# Altium PCB bootleg-4.PcbDoc (part 1 of 2)
Units mm, origin at the board's own origin, x right, y up, seen from the top; angles counter-clockwise.
Board outline 284.8 x 94.3 mm, 2 copper layers (Component Side, Bottom Layer), stack 1.571 mm thick; 140 components, 94 nets, 601 pads, 29 vias.
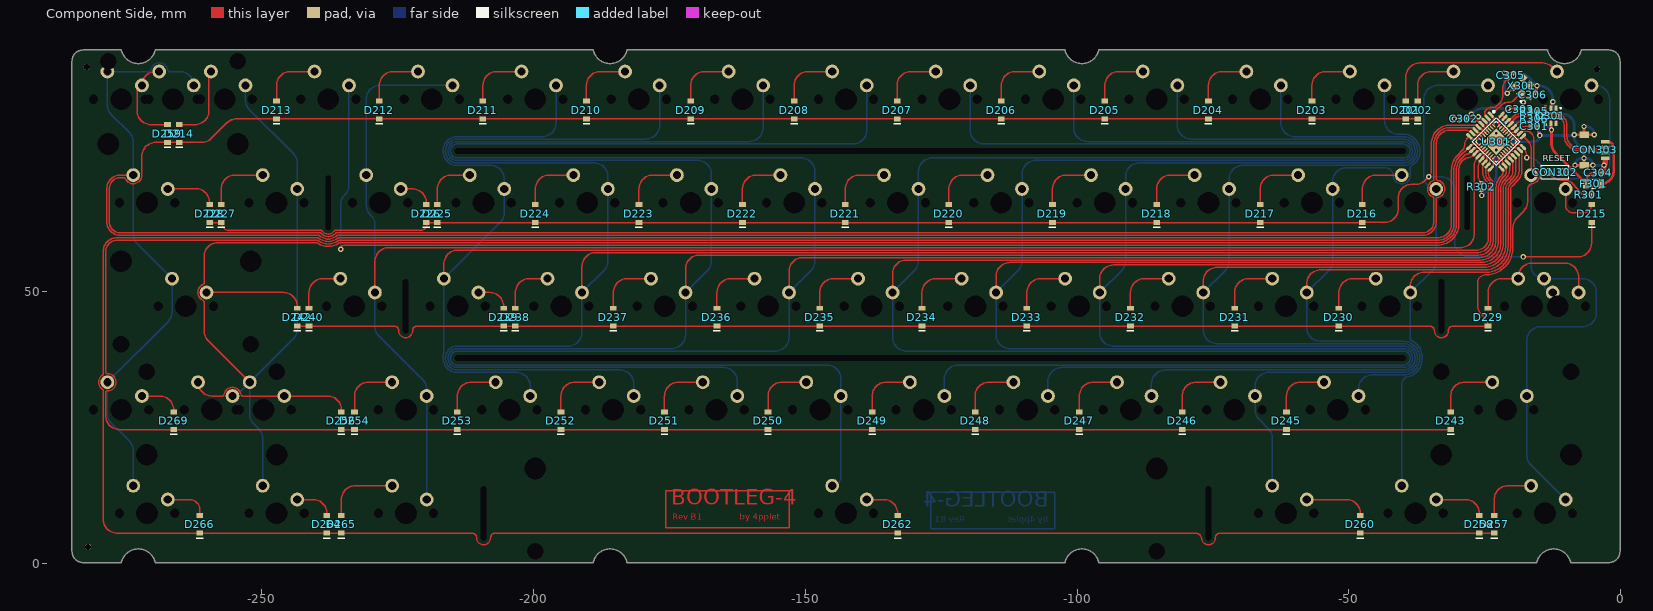
[diagram p0: Component Side view]
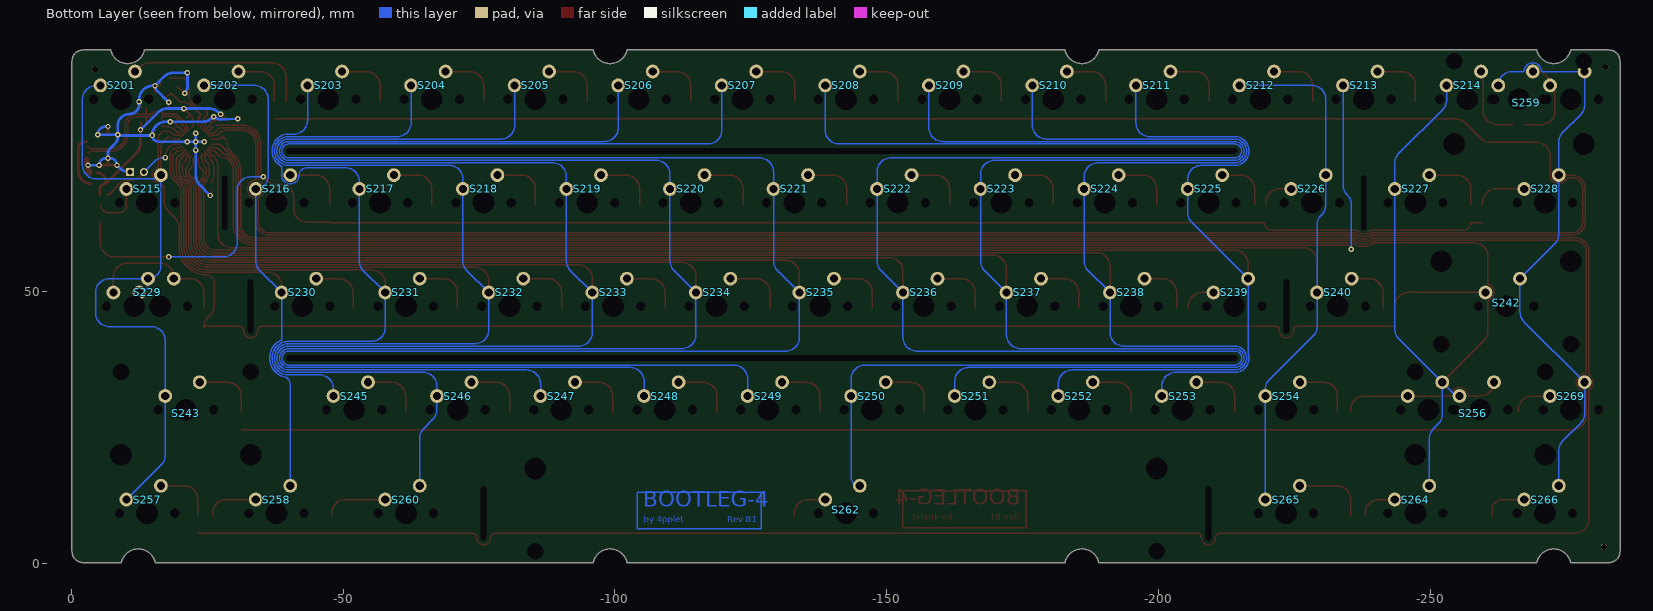
[diagram p1: Bottom Layer view, seen from below]

## Layer stack, top to bottom
Top Solder: solder mask 0.0102, Solder Resist, Dk 3.5
Component Side: signal copper 0.0356
Dielectric 1: core 1.5, FR-4, Dk 4.2
Bottom Layer: signal copper 0.0356
Solder Side: solder mask 0.0102, Solder Resist, Dk 3.5

## Board outline
-282.85,0.165 ccw(c-282.85,0.215) -282.85,0.165 cw(c-282.85,2.215) -284.9,2.215 -284.9,36.565 -284.9,92.414 cw(c-284.85,92.415) -284.9,92.415 cw(c-282.85,92.415) -282.85,94.465 cw(c-282.85,94.415) -282.85,94.465 -275.85,94.465 cw(c-275.85,94.415) -275.801,94.426 ccw(c-272.7,95.149) -269.599,94.426 cw(c-269.55,94.415) -269.55,94.465 -189.05,94.465 cw(c-189.05,94.415) -189.001,94.426 ccw(c-185.9,95.149) -182.799,94.426 cw(c-182.75,94.415) -182.75,94.465 -102.25,94.465 cw(c-102.25,94.415) -102.201,94.426 ccw(c-99.1,95.149) -95.999,94.426 cw(c-95.95,94.415) -95.95,94.465 cw(c-95.95,94.415) -95.95,94.465 -13.477,94.465 cw(c-13.477,94.415) -13.428,94.426 ccw(c-10.327,95.149) -7.226,94.426 cw(c-7.177,94.415) -7.164,94.464 cw(c-7.15,94.415) -7.15,94.465 -2.15,94.465 cw(c-2.15,92.415) -0.1,92.415 -0.1,2.288 -0.1,2.286 ccw(c-0.15,2.286) -0.1,2.288 -0.1,2.286 cw(c-0.15,2.286) -0.1,2.285 -0.1,2.215 cw(c-2.15,2.215) -2.15,0.165 -9.15,0.165 ccw(c-9.15,0.215) -9.15,0.165 cw(c-9.15,0.215) -9.199,0.204 ccw(c-12.3,-0.52) -15.401,0.204 cw(c-15.45,0.215) -15.45,0.165 -95.95,0.165 cw(c-95.95,0.215) -95.999,0.204 ccw(c-99.1,-0.52) -102.201,0.204 ccw(c-99.1,-0.52) -102.201,0.204 cw(c-102.25,0.215) -102.25,0.165 -182.75,0.165 cw(c-182.75,0.215) -182.799,0.204 cw(c-185.9,-0.52) -182.799,0.204 ccw(c-185.9,-0.52) -189.001,0.204 cw(c-189.05,0.215) -189.05,0.165 -269.55,0.165 cw(c-269.55,0.215) -269.55,0.165 cw(c-269.55,0.215) -269.599,0.204 ccw(c-272.7,-0.52) -275.801,0.204 ccw(c-272.7,-0.52) -275.801,0.204 cw(c-275.85,0.215) -275.85,0.165

## Design rules (kind name [scope] priority, off if disabled: settings)
Clearance [All] p1: gap=0.2 ignorepadtopadclearanceinfootprint=FALSE except(0: Arc-Hole Track-Hole SMDPad-Hole THPad-Hole Via-Hole Fill-Hole Poly-Hole Region-Hole Text-Hole; 0.254: THPad-THPad THPad-Via THPad-Fill THPad-Poly THPad-Region THPad-Text Via-Via Via-Fill Via-Poly Via-Region Via-Text Fill-Fill Fill-Poly Fill-Region Fill-Text Poly-Poly Poly-Region Poly-Text Region-Region Region-Text Text-Text)
ComponentClearance [InComponent('No Component') And OnLayer('Component Side')] p1: gap=0.254 collisioncheckmode=3 verticalgap=0.254 showdistances=FALSE
DiffPairsRouting DiffPairsRouting_USB [InDifferentialPairClass('All Differential Pairs')] p1: maxlimit=0.254 minlimit=0.203 mostfreqgap=0.203 toplayer_minwidth=0.152 toplayer_maxwidth=0.381 toplayer_prefwidth=0.152 bottomlayer_minwidth=0.152 bottomlayer_maxwidth=0.381 bottomlayer_prefwidth=0.152 maxuncoupledlength=12.7
DiffPairsRouting [All] p2: maxlimit=0.254 minlimit=0.254 mostfreqgap=0.254 toplayer_minwidth=0.381 toplayer_maxwidth=0.381 toplayer_prefwidth=0.381 bottomlayer_minwidth=0.381 bottomlayer_maxwidth=0.381 bottomlayer_prefwidth=0.381 maxuncoupledlength=12.7
HoleSize [All] p1: absolutevalues=TRUE maxlimit=20 minlimit=0.025 maxpercent=80.000 minpercent=20.000
MatchedLengths MatchedLengths_USB_DiffPairs_1 [All] p1: tolerance=0.127 checknetsindiffpair=TRUE checkdiffpairvsdiffpair=FALSE checkxsignals=FALSE checkothers=FALSE
MatchedLengths MatchedLengths_USB_DiffPairs [All] p2: tolerance=0.127 checknetsindiffpair=TRUE checkdiffpairvsdiffpair=FALSE checkxsignals=FALSE checkothers=FALSE
PolygonConnect PolygonConnect_1 [All vs IsVia] p1: connectstyle=Direct reliefconductorwidth=0.254 reliefentries=4 polygonreliefangle="90 Angle" airgapwidth=0.254
PolygonConnect [All] p2: connectstyle=Relief reliefconductorwidth=0.254 reliefentries=4 polygonreliefangle="90 Angle" airgapwidth=0.254
RoutingVias [All] p1: holewidth=0.711 width=1.27 viastyle="Through Hole" minholewidth=0.711 minwidth=1.27 maxholewidth=0.711 maxwidth=1.27
SolderMaskExpansion [All] p1: expansion=0.102 istentingtop=FALSE
Width [All] p1: maxlimit=1 minlimit=0.203 preferedwidth=0.254 minimp=50.000000 maximp=50.000000 favimp=50.000000
27 further rules are at their usual default settings.

## Classes and differential pairs
component class Designator: C201 C202 C203 C204 C205 C206 D201 D202 D203 D204 D205 D206 D207 D208 D209 D210 D211 D212 D213 D214 D215 D216 D217 D218 D219 D220 D221 D222 D223 D224 D225 D226 D227 D228 D229 D230 D231 D232 D233 D234 D235 D236 D237 D238 D239 D240 D242 D243 D245 D246 D247 D248 D249 D250 D251 D252 D253 D254 D256 D257 D258 D259 D260 D262 D264 D265 D266 D269 S201 S202 S203 S204 S205 S206 S207 S208 S209 S210 S211 S212 S213 S214 S215 S216 S217 S218 S219 S220 S221 S222 S223 S224 S225 S226 S227 S228 S229 S230 S231 S232 S233 S234 S235 S236 S237 S238 S239 S240 S242 S243 S245 S246 S247 S248 S249 S250 S251 S252 S253 S254 S256 S257 S258 S259 S260 S262 S264 S265 S266 S269
differential pair D: +D_P -D_N
differential pair D_PRE: +D_PRE_P -D_PRE_N

## Components (designator, comment, footprint, x,y, rotation, side; value= is the part's Value field where it differs from the comment)
C301 "" C0603[1608] -15.875,80.391 r180 top value=1uF
C302 "" C0603[1608] -28.829,81.788 r0 top value=0.1uF
C303 "" C0603[1608] -18.542,83.566 r180 top value=0.1uF
C304 "" C0603[1608] -4.064,71.882 r180 top value=4,7uF
C305 "" C0603[1608] -20.193,89.789 r225 top value=15pF
C306 "" C0603[1608] -16.129,86.233 r225 top value=15pF
CON302 "Header 2" HDR1X2 -10.795,72.009 r180 top
CON303 "Header 5" "JST SM04B-SRSS-TB" -6.669,78.865 r270 top locked
D201 "Diode" SOD-123 -39.497,83.415 r90 top
D202 "Diode" SOD-123 -37.338,83.415 r90 top
D203 "Diode" SOD-123 -56.769,83.415 r90 top
D204 "Diode" SOD-123 -75.819,83.415 r90 top
D205 "Diode" SOD-123 -94.869,83.415 r90 top
D206 "Diode" SOD-123 -113.919,83.415 r90 top
D207 "Diode" SOD-123 -133.096,83.415 r90 top
D208 "Diode" SOD-123 -152.019,83.415 r90 top
D209 "Diode" SOD-123 -171.069,83.415 r90 top
D210 "Diode" SOD-123 -190.246,83.415 r90 top
D211 "Diode" SOD-123 -209.296,83.415 r90 top
D212 "Diode" SOD-123 -228.346,83.415 r90 top
D213 "Diode" SOD-123 -247.269,83.415 r90 top
D214 "Diode" SOD-123 -265.176,79.097 r90 top
D215 "Diode" SOD-123 -5.334,64.365 r90 top
D216 "Diode" SOD-123 -47.498,64.365 r90 top
D217 "Diode" SOD-123 -66.294,64.365 r90 top
D218 "Diode" SOD-123 -85.344,64.365 r90 top
D219 "Diode" SOD-123 -104.521,64.365 r90 top
D220 "Diode" SOD-123 -123.571,64.365 r90 top
D221 "Diode" SOD-123 -142.621,64.365 r90 top
D222 "Diode" SOD-123 -161.544,64.365 r90 top
D223 "Diode" SOD-123 -180.594,64.365 r90 top
D224 "Diode" SOD-123 -199.644,64.365 r90 top
D225 "Diode" SOD-123 -217.678,64.365 r90 top
D226 "Diode" SOD-123 -219.71,64.365 r90 top
D227 "Diode" SOD-123 -257.429,64.365 r90 top
D228 "Diode" SOD-123 -259.588,64.365 r90 top
D229 "Diode" SOD-123 -24.384,45.315 r90 top
D230 "Diode" SOD-123 -51.816,45.315 r90 top
D231 "Diode" SOD-123 -70.993,45.315 r90 top
D232 "Diode" SOD-123 -90.17,45.315 r90 top
D233 "Diode" SOD-123 -109.22,45.315 r90 top
D234 "Diode" SOD-123 -128.524,45.315 r90 top
D235 "Diode" SOD-123 -147.32,45.315 r90 top
D236 "Diode" SOD-123 -166.243,45.315 r90 top
D237 "Diode" SOD-123 -185.293,45.315 r90 top
D238 "Diode" SOD-123 -203.327,45.315 r90 top
D239 "Diode" SOD-123 -205.486,45.315 r90 top
D240 "Diode" SOD-123 -241.3,45.315 r90 top
D242 "Diode" SOD-123 -243.459,45.315 r90 top
D243 "Diode" SOD-123 -31.242,26.265 r90 top
D245 "Diode" SOD-123 -61.468,26.265 r90 top
D246 "Diode" SOD-123 -80.645,26.265 r90 top
D247 "Diode" SOD-123 -99.568,26.265 r90 top
D248 "Diode" SOD-123 -118.745,26.265 r90 top
D249 "Diode" SOD-123 -137.668,26.265 r90 top
D250 "Diode" SOD-123 -156.845,26.265 r90 top
D251 "Diode" SOD-123 -175.895,26.265 r90 top
D252 "Diode" SOD-123 -194.945,26.265 r90 top
D253 "Diode" SOD-123 -213.995,26.265 r90 top
D254 "Diode" SOD-123 -232.918,26.265 r90 top
D256 "Diode" SOD-123 -235.331,26.265 r90 top
D257 "Diode" SOD-123 -23.241,7.215 r90 top
D258 "Diode" SOD-123 -26,7.215 r90 top
D259 "Diode" SOD-123 -267.335,79.097 r90 top
D260 "Diode" SOD-123 -47.879,7.215 r90 top
D262 "Diode" SOD-123 -133,7.215 r90 top
D264 "Diode" SOD-123 -238,7.215 r90 top
D265 "Diode" SOD-123 -235.331,7.215 r90 top
D266 "Diode" SOD-123 -261.366,7.215 r90 top
D269 "Diode" SOD-123 -266.192,26.265 r90 top
D301 "SRV05" SOT-23-6 -12.827,82.38 r270 top
F301 "Fuse Thermal" C1206[3216] -4.953,69.85 r0 top
R301 "Res1" R0603[1608] -5.842,67.818 r180 top value=10K
R302 "Res1" R0603[1608] -25.654,69.342 r270 top value=10K
R305 "Res1" R0603[1608] -15.875,83.185 r0 top value=22
R306 "Res1" R0603[1608] -15.875,81.788 r0 top value=22
S201 "MX" "MX-switch - switched pol" -9.15,85.415 r180 bottom locked
S202 "MX" "MX-switch - switched pol" -28.2,85.415 r180 bottom locked
S203 "MX" "MX-SWITCH - SWITCHED POL" -47.25,85.415 r180 bottom locked
S204 "MX" "MX-switch - switched pol" -66.3,85.415 r180 bottom locked
S205 "MX" "MX-switch - switched pol" -85.35,85.415 r180 bottom locked
S206 "MX" "MX-switch - switched pol" -104.4,85.415 r180 bottom locked
S207 "MX" "MX-switch - switched pol" -123.45,85.415 r180 bottom locked
S208 "MX" "MX-switch - switched pol" -142.5,85.415 r180 bottom locked
S209 "MX" "MX-switch - switched pol" -161.55,85.415 r180 bottom locked
S210 "MX" "MX-switch - switched pol" -180.6,85.415 r180 bottom locked
S211 "MX" "MX-switch - switched pol" -199.65,85.415 r180 bottom locked
S212 "MX" "MX-switch - switched pol" -218.7,85.415 r180 bottom locked
S213 "MX" "MX-switch - switched pol" -237.75,85.415 r180 bottom locked
S214 "MX" "MX-switch - switched pol" -256.8,85.415 r180 bottom locked
S215 "MX" "MX-switch - 1.5U" -13.912,66.365 r180 bottom locked
S216 "MX" "MX-SWITCH - SWITCHED POL" -37.725,66.365 r180 bottom locked
S217 "MX" "MX-SWITCH - SWITCHED POL" -56.775,66.365 r180 bottom locked
S218 "MX" "MX-SWITCH - SWITCHED POL" -75.825,66.365 r180 bottom locked
S219 "MX" "MX-SWITCH - SWITCHED POL" -94.875,66.365 r180 bottom locked
S220 "MX" "MX-SWITCH - SWITCHED POL" -113.925,66.365 r180 bottom locked
S221 "MX" "MX-SWITCH - SWITCHED POL" -132.975,66.365 r180 bottom locked
S222 "MX" "MX-SWITCH - SWITCHED POL" -152.025,66.365 r180 bottom locked
S223 "MX" "MX-SWITCH - SWITCHED POL" -171.075,66.365 r180 bottom locked
S224 "MX" "MX-SWITCH - SWITCHED POL" -190.125,66.365 r180 bottom locked
S225 "MX" "MX-SWITCH - SWITCHED POL" -209.175,66.365 r180 bottom locked
S226 "MX" MX-switch -228.225,66.365 r180 bottom locked
S227 "MX" "MX-SWITCH - SWITCHED POL" -247.275,66.365 r180 bottom locked
S228 "MX" "MX-switch - 1.5U" -271.087,66.365 r180 bottom locked
S229 "MX" "MX-switch - CAPS" -16.294,47.315 r180 bottom
S230 "MX" "MX-SWITCH - SWITCHED POL" -42.487,47.315 r180 bottom locked
S231 "MX" "MX-SWITCH - SWITCHED POL" -61.537,47.315 r180 bottom locked
S232 "MX" "MX-SWITCH - SWITCHED POL" -80.587,47.315 r180 bottom locked
S233 "MX" "MX-SWITCH - SWITCHED POL" -99.637,47.315 r180 bottom locked
S234 "MX" "MX-SWITCH - SWITCHED POL" -118.687,47.315 r180 bottom locked
S235 "MX" "MX-SWITCH - SWITCHED POL" -137.737,47.315 r180 bottom locked
S236 "MX" "MX-SWITCH - SWITCHED POL" -156.787,47.315 r180 bottom locked
S237 "MX" "MX-SWITCH - SWITCHED POL" -175.837,47.315 r180 bottom locked
S238 "MX" "MX-SWITCH - SWITCHED POL" -194.887,47.315 r180 bottom locked
S239 "MX" MX-switch -213.937,47.315 r180 bottom locked
S240 "MX" "MX-SWITCH - SWITCHED POL" -232.987,47.315 r180 bottom locked
S242 "MX" "MX-switch - Enter_ANSI" -263.95,47.315 r180 bottom locked
S243 "MX" "MX-switch - 2.25U" -21.056,28.265 r180 bottom locked
S245 "MX" "MX-SWITCH - SWITCHED POL" -52.012,28.265 r180 bottom locked
S246 "MX" "MX-SWITCH - SWITCHED POL" -71.062,28.265 r180 bottom locked
S247 "MX" "MX-SWITCH - SWITCHED POL" -90.112,28.265 r180 bottom locked
S248 "MX" "MX-SWITCH - SWITCHED POL" -109.162,28.265 r180 bottom locked
S249 "MX" "MX-SWITCH - SWITCHED POL" -128.212,28.265 r180 bottom locked
S250 "MX" "MX-SWITCH - SWITCHED POL" -147.262,28.265 r180 bottom locked
S251 "MX" "MX-SWITCH - SWITCHED POL" -166.312,28.265 r180 bottom locked
S252 "MX" "MX-SWITCH - SWITCHED POL" -185.362,28.265 r180 bottom locked
S253 "MX" "MX-SWITCH - SWITCHED POL" -204.412,28.265 r180 bottom locked
S254 "MX" "MX-SWITCH - SWITCHED POL" -223.462,28.265 r180 bottom locked
S256 "MX" "MX-switch - right shift" -259.18,28.265 r180 bottom locked
S257 "MX" "MX-switch - 1.5U - switched pol" -13.912,9.215 r180 bottom locked
S258 "MX" MX-switch -37.719,9.215 r180 bottom locked
S259 "MX" "MX-switch - backspace" -266.319,85.415 r180 bottom locked
S260 "MX" "MX-switch - 1.5U" -61.537,9.215 r180 bottom locked
S262 "MX" "MX-SWITCH - 7U SPACE" -142.5,9.215 r0 bottom locked
S264 "MX" MX-switch -247.269,9.215 r180 bottom locked
S265 "MX" "MX-switch - 1.5U - switched pol" -223.45,9.215 r180 bottom locked
S266 "MX" "MX-switch - 1.5U" -271.087,9.215 r180 bottom locked
S269 "MX" MX-SWITCH -275.85,28.265 r180 bottom locked
U301 "ATMEGA32U2" ATMEGA32U2-COMBO -22.886,77.6 r315 top
X301 "XTAL" XTAL-3225 -18.161,87.884 r45 top

## Footprints (in the part's own frame and the unit in brackets; to place one, negate y for a bottom-side part, rotate by r counter-clockwise, add the part's x,y. Pads: shape width x height; smd on the part's side, far side on the other; paste and mask are expansions set on the pad)
ATMEGA32U2-COMBO [mm]
  oval 1.4x0.55 smd: 1(-4.2,2.8) 2(-4.2,2) 3(-4.2,1.2) 4(-4.2,0.4) 5(-4.2,-0.4) 6(-4.2,-1.2) 7(-4.2,-2) 8(-4.2,-2.8) 17(4.2,-2.8) 18(4.2,-2) 19(4.2,-1.2) 20(4.2,-0.4) 21(4.2,0.4) 22(4.2,1.2) 23(4.2,2) 24(4.2,2.8)
  oval 0.85x0.25 smd: 1(-2.4,1.75) 2(-2.4,1.25) 3(-2.4,0.75) 4(-2.4,0.25) 5(-2.4,-0.25) 6(-2.4,-0.75) 7(-2.4,-1.25) 8(-2.4,-1.75) 17(2.4,-1.75) 18(2.4,-1.25) 19(2.4,-0.75) 20(2.4,-0.25) 21(2.4,0.25) 22(2.4,0.75) 23(2.4,1.25) 24(2.4,1.75)
  oval 0.55x1.4 smd: 9(-2.8,-4.2) 10(-2,-4.2) 11(-1.2,-4.2) 12(-0.4,-4.2) 13(0.4,-4.2) 14(1.2,-4.2) 15(2,-4.2) 16(2.8,-4.2) 25(2.8,4.2) 26(2,4.2) 27(1.2,4.2) 28(0.4,4.2) 29(-0.4,4.2) 30(-1.2,4.2) 31(-2,4.2) 32(-2.8,4.2)
  oval 0.25x0.85 smd: 9(-1.75,-2.4) 10(-1.25,-2.4) 11(-0.75,-2.4) 12(-0.25,-2.4) 13(0.25,-2.4) 14(0.75,-2.4) 15(1.25,-2.4) 16(1.75,-2.4) 25(1.75,2.4) 26(1.25,2.4) 27(0.75,2.4) 28(0.25,2.4) 29(-0.25,2.4) 30(-0.75,2.4) 31(-1.25,2.4) 32(-1.75,2.4)
  rect 3.5x3.5 smd: 28(0,0)
  silkscreen extent -4.32,-3.1 3.1,3.75, body extent -2.51,-2.51 2.51,2.51, height 1
C0603[1608] [mm] "Chip Resistor, 2-Leads, Body 1,57x0,80mm, IPC Medium Density"
  rect 0.8x0.85 smd: 1(-0.65,0) 2(0.65,0)
  body extent -0.83,-0.43 0.82,0.43, height 0.5
C1206[3216] [mm]
  rect 1.2x1.8 smd: 1(-1.35,0) 2(1.35,0)
  silkscreen extent -0.35,-0.8 0.35,0.8, body extent -1.6,-0.9 1.6,0.9, height 1.2
HDR1X2 [mm] "Connector; Header; 2 Position"
  rect 1.5x1.5 hole 0.9 mask+0.102: 1(0,0)
  round 1.5 hole 0.9 mask+0.102: 2(2.54,0)
  silkscreen extent -1.27,-1.27 3.81,1.27
"JST SM04B-SRSS-TB" [mm]
  rect 0.6x1.55 smd: 1(1.3,3.875) 2(2.3,3.875) 3(3.3,3.875) 4(4.3,3.875)
  rect 1.2x1.8 smd: 5(0,0) 5(5.6,0)
  body extent -0.21,-0.76 5.79,4.19, height 3.25
MX-switch [mm]
  round 2.54 hole 1.499 mask+0.102: 1(-3.81,2.54) 2(2.54,5.08)
  round 1 hole 1.702 unplated: ""(-5.08,0) ""(5.08,0)
  round 1 hole 3.988 unplated: ""(0,0)
MX-SWITCH [mm]
  round 2.54 hole 1.499 mask+0.102: 1(-3.81,2.54) 2(2.54,5.08)
  round 1 hole 1.702 unplated: ""(-5.08,0) ""(5.08,0)
  round 1 hole 3.988 unplated: ""(0,0)
"MX-switch - 1.5U" [mm]
  round 2.54 hole 1.499 mask+0.102: 1(-3.81,2.54) 2(2.54,5.08)
  round 1 hole 1.702 unplated: ""(-5.08,0) ""(5.08,0)
  round 1 hole 3.988 unplated: ""(0,0)
  round 1 on Mech14: ""(0,0)
"MX-switch - 1.5U - switched pol" [mm]
  round 2.54 hole 1.499 mask+0.102: 1(2.54,5.08) 2(-3.81,2.54)
  round 1 hole 1.702 unplated: ""(-5.08,0) ""(5.08,0)
  round 1 hole 3.988 unplated: ""(0,0)
  round 1 on Mech14: ""(0,0)
"MX-switch - 2.25U" [mil]
  round 100 hole 59 mask+4: 1(-150,100) 2(100,200)
  round 60 hole 157.01 unplated: ""(-470,-325) ""(470,-325)
  round 60 hole 120 unplated: ""(-470,275) ""(470,275)
  round 39.37 hole 67.01 unplated: ""(-200,0) ""(200,0)
  round 39.37 hole 157.01 unplated: ""(0,0)
  round 39.37 on Mech14: ""(0,0)
"MX-SWITCH - 7U SPACE" [mil]
  round 100 hole 59 mask+4: 1(150,-100) 2(-100,-200)
  round 60 hole 157.01 unplated: ""(-2250,-325) ""(2250,-325)
  round 60 hole 120 unplated: ""(-2250,275) ""(2250,275)
  round 39.37 hole 67.01 unplated: ""(-200,0) ""(200,0)
  round 39.37 hole 157.01 unplated: ""(0,0)
  round 39.37 on Mech14: ""(0,0)
"MX-switch - backspace" [mil]
  round 100 hole 59 mask+4: 1(100,200) 1(225,100) 2(-150,100) 2(475,200)
  round 60 hole 157.01 unplated: ""(-470,-325) ""(470,-325)
  round 60 hole 120 unplated: ""(-470,275) ""(470,275)
  round 39.37 hole 67.01 unplated: ""(-200,0) ""(175,0) ""(200,0) ""(575,0)
  round 39.37 hole 157.01 unplated: ""(0,0) ""(375,0)
  round 39.37 on Mech14: ""(0,0) ""(375,0)
"MX-switch - CAPS" [mm]
  round 2.54 hole 1.499 mask+0.102: 1(-8.572,2.54) 1(2.54,5.08) 2(-3.81,2.54) 2(-2.222,5.08)
  round 1 hole 1.702 unplated: ""(-9.842,0) ""(5.08,0)
  round 1 hole 3.988 unplated: ""(-4.763,0) ""(0,0)
  round 1 on Mech14: ""(-4.763,0) ""(0,0)
"MX-switch - Enter_ANSI" [mil]
  round 100 hole 59 mask+4: 1(100,200) 2(-150,100)
  round 60 hole 120 unplated: ""(-470,-275) ""(470,-275)
  round 60 hole 157.01 unplated: ""(-470,325) ""(470,325)
  round 39.37 on Mech14: ""(-468.75,0) ""(-468.75,0) ""(0,0) ""(0,0)
  round 39.37 hole 67.01 unplated: ""(-200,0) ""(200,0)
  round 39.37 hole 157.01 unplated: ""(0,0)
"MX-switch - right shift" [mil]
  round 100 hole 59 mask+4: 1(-525,100) 1(100,200) 2(-275,200) 2(-150,100)
  round 39.37 hole 67.01 unplated: ""(-575,0) ""(-200,0) ""(-175,0) ""(200,0)
  round 60 hole 157.01 unplated: ""(-470,-325) ""(470,-325)
  round 60 hole 120 unplated: ""(-470,275) ""(470,275)
  round 39.37 hole 157.01 unplated: ""(-375,0) ""(0,0)
  round 39.37 on Mech14: ""(-375,0) ""(0,0)
"MX-switch - switched pol" [mm]
  round 2.54 hole 1.499 mask+0.102: 1(2.54,5.08) 2(-3.81,2.54)
  round 1 hole 1.702 unplated: ""(-5.08,0) ""(5.08,0)
  round 1 hole 3.988 unplated: ""(0,0)
"MX-SWITCH - SWITCHED POL" [mm]
  round 2.54 hole 1.499 mask+0.102: 1(2.54,5.08) 2(-3.81,2.54)
  round 1 hole 1.702 unplated: ""(-5.08,0) ""(5.08,0)
  round 1 hole 3.988 unplated: ""(0,0)
R0603[1608] [mm] "Chip Resistor, 2-Leads, Body 1,57x0,80mm, IPC Medium Density"
  rect 0.8x0.85 smd: 1(-0.65,0) 2(0.65,0)
  body extent -0.83,-0.43 0.82,0.43, height 0.5
SOD-123 [mm]
  rect 0.91x1.22 smd: 1(1.635,0) 2(-1.635,0)
  silkscreen extent -2.54,-0.64 -2.54,0.63, body extent -1.87,-0.85 1.88,0.85, height 1.2
SOT-23-6 [mm]
  rect 1x0.55 smd: 1(-1.375,0.95) 2(-1.375,0) 3(-1.375,-0.95) 4(1.375,-0.95) 5(1.375,0) 6(1.375,0.95)
  silkscreen extent -1.5,-1.55 0.46,1.93, body extent -1.37,-1.44 1.47,1.49, height 1.05
XTAL-3225 [mm]
  rect 1.4x1.2 smd: 1(-1.1,-0.85) 2(1.1,-0.85) 3(1.1,0.85) 4(-1.1,0.85)
  silkscreen extent -2.28,-2.03 -2.03,-1.78, body extent -1.6,-1.25 1.6,1.25, height 0.65

## Part data
C301: library part Cap, "Capacitor", LCSC MFG="Samsung Electro-Mechanics", LCSC Part #=C15849, MFG=KEMET, MFGPN=C0603C104M5RACTU, MRF.Part=CL10A105KB8NNNC, Version="0603 imperial"
C302 C303: library part Cap, "Capacitor", LCSC MFG=YAGEO, LCSC Part #=C14663, MFG=KEMET, MFGPN=C0603C104M5RACTU, MRF.Part=CC0603KRX7R9BB104, Version="0603 imperial"
C304: library part Cap, "Capacitor", LCSC MFG="Samsung Electro-Mechanics", LCSC Part #=C19666, MRF.Part=CL10A475KO8NNNC
C305 C306: library part Cap, "Capacitor", LCSC MFG="Samsung Electro-Mechanics", LCSC Part #=C1644, MRF.Part=CL10C150JB8NNNC, Version="0603 imperial"
CON302: "Header, 2-Pin"
CON303: "JST for USB daughter board", LCSC MFG="JST Sales America", LCSC Part #=C160404, MFG="JST Sales America Inc.", MFGPN=SM04B-SRSS-TB(LF)(SN), MRF.Part=SM04B-SRSS-TB(LF)(SN)
D201 D202 D203 D204 D205 D206 D207 D208 D209 D210 D211 D212 D213 D214 D215 D216 D217 D218 D219 D220 D221 D222 D223 D224 D225 D226 D227 D228 D229 D230 D231 D232 D233 D234 D235 D236 D237 D238 D239 D240 D242 D243 D245 D246 D247 D248 D249 D250 D251 D252 D253 D254 D256 D257 D258 D259 D260 D262 D264 D265 D266 D269: "Default Diode", LCSC MFG="Brightking Elec (TAIWAN)", LCSC Part #=C109002, MFG="Bourns Inc.", MFGPN=CD0603-B0340R, MRF.Part=CD4148WTP, Version="0603 imperial"
D301: LCSC MFG="ProTek Devices", LCSC Part #=C85364, MRF.Part=SRV05-4-P-T7
F301: "Thermal Fuse", LCSC MFG="Shenzhen JDT Fuse", LCSC Part #=C135338, MFG="Bel Fuse Inc.", MFGPN=0ZCJ0050FF2G, MRF.Part=ASMD1206-050
R301 R302: "Resistor", LCSC MFG="Uniroyal Elec", LCSC Part #=C25804, MFG="Panasonic Electronic Components", MFGPN=ERJ-3EKF5101V, MRF.Part=0603WAF1002T5E, Version="0603 imperial"
R305 R306: "Resistor", LCSC MFG="Uniroyal Elec", LCSC Part #=C23345, MFG="Panasonic Electronic Components", MFGPN=ERJ-3EKF5101V, MRF.Part=0603WAF220JT5E, Version="0603 imperial"
S201 S202 S203 S204 S205 S206 S207 S208 S209 S210 S211 S212 S213 S214 S216 S217 S218 S219 S220 S221 S222 S223 S224 S225 S226 S227 S228 S229 S230 S231 S232 S233 S234 S235 S236 S237 S238 S239 S240 S242 S243 S245 S246 S247 S248 S249 S250 S251 S252 S253 S254 S256 S257 S258 S259 S260 S262 S264 S265 S266 S269: library part SW-PB, "Switch"
S215: library part SW-PB, "TAB"
U301: LCSC MFG="Microchip Tech", LCSC Part #=C57345, MFG="Microchip Technology", MFGPN=ATMEGA32U2-AUR, MRF.Part=ATMEGA32U2-MU
X301: "Crystal Oscillator", LCSC MFG="Yangxing Tech", LCSC Part #=C13738, MRF.Part=X322516MLB4SI

## Free pads (board coordinates)
  round 1.152 hole 1.152 unplated paste+0.148 mask+0.148: ""(-282.194,91.313) ""(-281.94,3.048) ""(-4.318,90.932)
  round 0 hole 1 slot 10 at 90 deg unplated: ""(-237.75,66.365) ""(-223.52,47.315) ""(-209.175,9.215) ""(-75.819,9.215) ""(-32.962,47.315) ""(-28.2,66.365)
  round 0 hole 1 slot 175 at 0 deg unplated: ""(-127,37.79) ""(-127,75.89)

## Via types
v1: diameter 1, hole 0.5, Component Side to Bottom Layer, tented both sides, 24 vias
v2: diameter 1, hole 0.5, Component Side to Bottom Layer, tented bottom, 5 vias

## Nets (pads, with @x,y where several pads share a name; then routed paths per layer and width w, separated by ;. In a path a pad name is that pad's centre, name@x,y a point inside that pad or via, vN(x,y) a via of type N, cw(c..) or ccw(c..) an arc to the next point about the centre after c; other vN are vias at no path point)
col1: S201.2 S215.2 S229.2 S243.1 S257.2 U301.25 | length 129.1
  Component Side w0.254: U301.25@-19.952,78.06 -19.217,78.06 ccw(c-19.217,79.871) U301.25@-18.101,78.444 ; U301.25@-17.936,78.59 -17.196,77.85 cw(c-18.992,76.054) -16.991,77.618 cw(c-18.291,76.318) -16.452,76.318 ; S215.2@-16.452,71.445 -16.445,74.673 ccw(c-17.272,74.676) -16.445,74.681 -16.452,76.317 ; S201.2@-5.34,87.955 S201.2@-5.334,87.949
  Bottom Layer w0.254: S229.2@-12.484,49.855 cw(c-12.484,51.443) -14.071,51.443 S229.2@-14.071,52.395 ; S257.2@-10.102,11.755 -16.502,18.155 cw(c-14.706,19.951) -17.246,19.951 S243.1@-17.246,30.805 -17.246,41.021 cw(c-14.706,41.021) -14.706,43.561 -6.985,43.561 ccw(c-6.985,46.101) -4.445,46.101 -4.445,49.855 ccw(c-6.985,49.855) -6.985,52.395 S229.2@-14.071,52.395 ; S201.2@-5.34,87.955 -4.572,87.955 cw(c-4.572,85.415) -2.032,85.415 -2.032,73.279 cw(c-4.572,73.279) -4.572,70.739 -14.748,70.739 cw(c-14.748,73.149) S215.2@-16.452,71.445 -16.452,54.776 ccw(c-14.071,54.776) S229.2@-14.071,52.395
col2: S202.2 S216.2 S230.2 S258.2 U301.23 | length 134.3
  Component Side w0.254: S230.2@-38.677,49.855 -38.677,51.016 cw(c-36.137,51.016) -38.676,51.113 cw(c-36.137,51.016) -36.235,53.554 cw(c-36.137,51.016) -36.137,53.556 -24.816,53.556 ccw(c-24.816,58.125) -23.158,53.867 ccw(c-24.816,58.125) -20.558,56.467 ccw(c-24.816,58.125) -20.247,58.125 -20.247,68.762 cw(c-19.301,68.762) -19.97,69.431 -18.909,70.492 ccw(c-20.705,72.288) -18.215,71.787 ccw(c-20.705,72.288) -18.182,71.992 ccw(c-20.705,72.288) -18.165,72.288 U301.23@-18.165,75.765 ; U301.23@-20.305,76.787 -19.972,76.454 -19.49,76.454 cw(c-19.49,75.056) U301.23@-18.503,76.045
  Bottom Layer w0.254: S258.2@-40.259,14.295 -40.259,32.828 cw(c-38.529,32.828) -39.522,34.245 cw(c-39.377,34.036) -39.418,34.287 ccw(c-40,37.79) -38.53,34.558 ; -38.529,34.558 ccw(c-40,37.79) -38.529,41.022 cw(c-38.423,41.253) -38.678,41.253 S230.2@-38.677,49.855 -34.659,53.874 ccw(c-36.455,55.67) -33.915,55.67 S216.2@-33.915,68.905 cw(c-33.915,71.185) -36.195,71.185 -36.195,85.415 cw(c-33.655,85.415) -33.655,87.955 S202.2@-24.39,87.955
col3: S203.2 S217.2 S231.2 S245.2 U301.22 | length 171.1
  Component Side w0.254: S231.2@-57.727,49.855 -57.727,51.47 cw(c-55.187,51.47) -55.187,54.01 -25.004,54.01 ccw(c-25.004,58.313) -23.31,54.357 ccw(c-25.004,58.313) -21.048,56.619 ccw(c-25.004,58.313) -20.701,58.313 -20.701,68.762 cw(c-19.301,68.762) -20.291,69.752 -19.387,70.656 ccw(c-21.122,72.39) -18.669,72.39 -18.669,75.08 U301.22@-19.068,75.479 -19.408,75.819 cw(c-19.408,77.355) -20.019,75.946 cw(c-19.408,77.355) U301.22@-20.494,76.269 ; S203.2@-43.561,87.955 -43.561,88.076 S203.2@-43.44,87.955 ; U301.22@-20.659,76.434 U301.22@-20.494,76.269
  Bottom Layer w0.254: S245.2@-48.202,30.805 -48.202,32.153 cw(c-45.662,32.153) -45.662,34.693 -40,34.693 ccw(c-40,37.79) -40,40.887 -44.069,40.887 -55.187,40.887 cw(c-55.187,43.427) -57.727,43.427 S231.2@-57.727,49.855 -53.709,53.874 ccw(c-55.505,55.67) -52.965,55.67 S217.2@-52.965,68.905 -52.965,70.253 cw(c-50.425,70.253) -50.425,72.793 -43.277,72.793 cw(c-43.277,71.376) -41.862,71.441 ; S203.2@-43.44,87.955 -43.44,81.527 ccw(c-40.9,81.527) -40.9,78.987 -40,78.987 cw(c-40,75.89) -38.036,73.496 cw(c-37.876,73.298) -37.973,73.533 ; -41.861,71.376 cw(c-40.265,71.445) -41.862,71.441 ; -38.037,73.495 cw(c-40,75.89) -38.531,73.163 ccw(c-38.411,72.94) -38.533,73.163 ccw(c-38.411,72.94) -38.656,73.005 ccw(c-37.973,72.827) -38.679,72.827 -38.679,71.649 ccw(c-38.425,71.649) -38.678,71.623 ccw(c-38.425,71.649) -38.678,71.621 cw(c-40.265,71.445) -38.679,71.256 cw(c-40.265,71.445) -41.862,71.441
col4: S204.2 S218.2 S232.2 S246.2 S260.2 U301.21 | length 277.3
  Component Side w0.254: S232.2@-76.777,49.855 -76.777,51.924 cw(c-74.237,51.924) -74.237,54.464 -25.192,54.464 ccw(c-25.192,58.501) -23.451,54.859 ccw(c-25.192,58.501) -21.55,56.76 ccw(c-25.192,58.501) -21.155,58.501 -21.155,68.762 cw(c-19.301,68.762) -20.612,70.073 -19.915,70.77 ccw(c-21.408,72.263) -19.297,72.263 -19.297,74.358 -19.358,74.358 -19.358,74.638 U301.21@-19.633,74.913 cw(c-19.633,75.425) -19.995,75.063 U301.21@-21.012,76.08
  Bottom Layer w0.254: S260.2@-64.077,14.295 -64.077,23.02 ccw(c-66.617,23.02) -64.821,24.816 -66.508,26.503 cw(c-64.712,28.299) -67.252,28.299 S246.2@-67.252,30.805 -67.252,32.607 cw(c-64.712,32.607) -64.712,35.147 -40,35.147 ccw(c-40,37.79) -40,40.433 -60.452,40.433 -74.237,40.433 cw(c-74.237,42.973) -76.777,42.973 S232.2@-76.777,49.855 -72.759,53.874 ccw(c-74.555,55.67) -72.015,55.67 S218.2@-72.015,68.905 -72.015,70.707 cw(c-69.475,70.707) -69.475,73.247 -40,73.247 ccw(c-40,75.89) -40,78.533 -49.149,78.533 -59.95,78.533 cw(c-59.95,81.073) -62.49,81.073 S204.2@-62.49,87.955
col5: S205.2 S219.2 S233.2 S247.2 U301.20 | length 353
  Component Side w0.254: S233.2@-95.827,49.855 -95.827,52.378 cw(c-93.287,52.378) -93.287,54.918 -25.38,54.918 ccw(c-25.38,58.689) -23.572,55.379 ccw(c-25.38,58.689) -22.07,56.881 ccw(c-25.38,58.689) -21.609,58.689 -21.609,63.119 -21.609,68.762 cw(c-19.301,68.762) -20.934,70.393 cw(c-19.301,68.762) -20.933,70.394 -20.334,70.993 ; U301.20@-21.366,75.726 -20.199,74.56 U301.20@-20.199,74.348 -19.812,73.961 -19.812,72.253 cw(c-21.595,72.253) -20.333,70.994
  Bottom Layer w0.254: S247.2@-86.302,30.805 -86.302,33.061 cw(c-83.762,33.061) -83.762,35.601 -40,35.601 ccw(c-40,37.79) -40,39.979 -77.978,39.979 -93.287,39.979 cw(c-93.287,42.519) -95.827,42.519 S233.2@-95.827,49.855 -91.809,53.874 ccw(c-93.605,55.67) -91.065,55.67 S219.2@-91.065,68.905 -91.065,71.161 cw(c-88.525,71.161) -88.525,73.701 -40,73.701 ccw(c-40,75.89) -40,78.079 -75.565,78.079 -79,78.079 cw(c-79,80.619) -79.002,78.079 cw(c-79,80.619) -79.868,78.232 cw(c-79,80.619) -81.54,80.619 S205.2@-81.54,87.955
col6: S206.2 S220.2 S234.2 S248.2 U301.19 | length 446
  Component Side w0.254: S234.2@-114.877,49.855 -114.877,52.832 cw(c-112.337,52.832) -112.337,55.372 -25.568,55.372 ccw(c-25.568,58.877) -23.651,55.942 ccw(c-25.568,58.877) -22.633,56.96 ccw(c-25.568,58.877) -22.063,58.877 -22.063,63.307 -22.063,68.762 cw(c-19.301,68.762) -21.255,70.714 cw(c-19.301,68.762) -21.254,70.715 -20.938,71.031 ccw(c-22.17,72.263) -20.428,72.263 U301.19@-20.428,73.642 ; U301.19@-21.719,75.373 -21.403,75.057 cw(c-22.18,74.281) -21.308,74.948 cw(c-22.18,74.281) -21.082,74.281 -21.082,74.099 U301.19@-20.765,73.782
  Bottom Layer w0.254: S248.2@-105.352,30.805 -105.352,33.515 cw(c-102.812,33.515) -102.812,36.055 -40,36.055 ccw(c-40,37.79) -40,39.525 -98.425,39.525 -112.337,39.525 cw(c-112.337,42.065) -114.877,42.065 S234.2@-114.877,49.855 -110.859,53.874 ccw(c-112.655,55.67) -110.115,55.67 S220.2@-110.115,68.905 -110.115,71.615 cw(c-107.575,71.615) -107.575,74.155 -40,74.155 ccw(c-40,75.89) -40,77.625 -94.615,77.625 -98.05,77.625 cw(c-98.05,80.165) -100.59,80.165 S206.2@-100.59,87.955
col7: S207.2 S221.2 S235.2 S249.2 U301.18 | length 539.6
  Component Side w0.254: S235.2@-133.927,49.855 -133.927,53.286 cw(c-131.387,53.286) -131.387,55.826 -25.756,55.826 ccw(c-25.756,59.065) -22.517,59.065 -22.517,63.495 -22.517,68.762 cw(c-19.301,68.762) -21.576,71.035 cw(c-19.301,68.762) -21.575,71.036 -21.36,71.251 ccw(c-22.245,72.136) -20.994,72.136 -20.994,72.599 -21.33,72.936 U301.18@-21.33,73.216 cw(c-20.288,74.259) -21.762,74.259 -21.762,74.709 U301.18@-22.073,75.019
  Bottom Layer w0.254: S249.2@-124.402,30.805 -124.402,33.969 cw(c-121.862,33.969) -121.862,36.509 -40,36.509 ccw(c-40,37.79) -40,39.071 -118.364,39.071 -127.635,39.071 -130.596,39.071 -131.387,39.071 cw(c-131.387,41.611) -133.927,41.611 S235.2@-133.927,49.855 -129.909,53.874 ccw(c-131.705,55.67) -129.165,55.67 S221.2@-129.165,68.905 -129.165,72.069 cw(c-126.625,72.069) -126.625,74.609 -40,74.609 ccw(c-40,75.89) -40,77.171 -105.664,77.171 -117.1,77.171 cw(c-117.1,79.711) -119.64,79.711 S207.2@-119.64,87.955
col8: S208.2 S222.2 S236.2 S250.2 S262.2 U301.17 | length 501.2
  Component Side w0.254: S236.2@-152.977,49.855 -152.977,53.74 cw(c-150.437,53.74) -150.437,56.28 -25.944,56.28 ccw(c-25.944,59.253) -22.971,59.253 -22.971,63.683 -22.971,67.818 -22.971,68.762 cw(c-19.301,68.762) -21.897,71.356 cw(c-19.301,68.762) -21.896,71.357 -21.834,71.419 ccw(c-22.425,72.009) -21.59,72.009 ccw(c-22.4,72.009) -21.827,72.582 U301.17@-21.896,72.651 ; U301.17@-22.426,74.666 -22.426,73.931 ccw(c-20.616,73.931) U301.17@-21.896,72.651
  Bottom Layer w0.254: -148.215,72.517 -148.215,72.069 ; S262.2@-145.04,14.295 ccw(c-145.04,15.883) -143.452,15.883 S250.2@-143.452,30.805 -143.452,33.969 ccw(c-145.992,33.969) -145.992,36.509 -214,36.509 cw(c-214,37.79) -214,39.071 -155.517,39.071 ccw(c-155.517,41.611) -152.977,41.611 S236.2@-152.977,49.855 -148.959,53.874 ccw(c-150.755,55.67) -148.215,55.67 S222.2@-148.215,68.905 -148.215,72.069 ; S208.2@-138.69,87.955 -138.69,79.711 cw(c-141.23,79.711) -141.23,77.171 -214,77.171 ccw(c-214,75.89) -214,74.609 -150.755,74.609 cw(c-150.755,72.069) -148.215,72.069
col9: S209.2 S223.2 S237.2 S251.2 U301.16 | length 427.2
  Component Side w0.254: S237.2@-172.027,49.855 -172.027,54.194 cw(c-169.487,54.194) -169.487,56.734 -26.132,56.734 ccw(c-26.132,59.441) -23.425,59.441 -23.425,69.666 ccw(c-24.944,69.666) -23.751,70.607 -24.122,71.077 cw(c-23.922,71.234) -24.147,71.117 cw(c-22.773,71.837) -24.313,71.652 -24.31,72.112 cw(c-24.056,72.111) U301.16@-24.238,72.289 ; U301.16@-24.237,72.29 U301.16@-23.876,72.651 ; U301.16@-23.876,72.651 ccw(c-25.156,73.931) -23.346,73.931 U301.16@-23.346,74.666
  Bottom Layer w0.254: S251.2@-162.502,30.805 -162.502,33.515 ; -162.502,33.909 -162.502,33.515 ; S209.2@-157.74,87.955 -157.74,80.165 cw(c-160.28,80.165) -160.28,77.625 -214,77.625 ccw(c-214,75.89) -214,74.155 -169.805,74.155 cw(c-169.805,71.615) -167.265,71.615 S223.2@-167.265,68.905 -167.265,55.67 cw(c-169.805,55.67) -168.009,53.874 S237.2@-172.027,49.855 -172.027,42.065 cw(c-174.567,42.065) -174.567,39.525 -214,39.525 ccw(c-214,37.79) -214,36.055 -165.042,36.055 cw(c-165.042,33.515) -162.502,33.515
col10: S210.2 S224.2 S238.2 S252.2 U301.15 | length 371.1
  Component Side w0.254: S238.2@-191.077,49.855 -191.077,54.648 cw(c-188.537,54.648) -188.537,57.188 -26.32,57.188 ccw(c-26.32,59.629) -23.879,59.629 -23.879,69.666 ccw(c-24.944,69.666) -24.191,70.419 cw(c-22.773,71.837) -24.779,71.837 -24.779,72.403 cw(c-23.629,72.403) U301.15@-24.442,73.216 ccw(c-25.484,74.259) -24.01,74.259 -24.01,74.709 U301.15@-23.699,75.019
  Bottom Layer w0.254: S252.2@-181.552,30.805 -181.552,33.061 ; -181.552,33.401 -181.552,33.061 ; S210.2@-176.79,87.955 -176.79,80.619 cw(c-179.33,80.619) -179.33,78.079 -214,78.079 ccw(c-214,75.89) -214,73.701 -188.855,73.701 cw(c-188.855,71.161) -186.315,71.161 S224.2@-186.315,68.905 -186.315,55.67 cw(c-188.855,55.67) -187.059,53.874 S238.2@-191.077,49.855 -191.077,42.519 cw(c-193.617,42.519) -193.617,39.979 -214,39.979 ccw(c-214,37.79) -214,35.601 -184.092,35.601 cw(c-184.092,33.061) -181.552,33.061
col11: S211.2 S225.2 S239.2 S253.2 U301.14 | length 317.4
  Component Side w0.254: S239.2@-216.477,52.395 -216.477,55.102 cw(c-213.937,55.102) -213.937,57.642 -26.508,57.642 ccw(c-26.508,59.817) -24.333,59.817 -24.333,69.478 ccw(c-25.398,69.478) -24.645,70.231 ; -24.646,70.232 cw(c-22.957,71.919) -25.344,71.919 -25.344,73.445 U301.14@-25.007,73.782 -24.638,74.151 -24.638,74.469 cw(c-23.87,74.469) -24.413,75.012 U301.14@-24.053,75.373
  Bottom Layer w0.254: S253.2@-200.602,30.805 -200.602,32.607 ; -200.602,33.02 -200.602,32.607 ; S211.2@-195.84,87.955 -195.84,81.073 cw(c-198.38,81.073) -198.38,78.533 -214,78.533 ccw(c-214,75.89) -214,73.247 -207.905,73.247 cw(c-207.905,70.707) -205.365,70.707 S225.2@-205.365,68.905 -205.365,64.56 cw(c-207.905,64.56) -206.109,62.764 S239.2@-216.477,52.395 -216.477,38.756 cw(c-216.731,38.755) -216.492,38.671 ccw(c-214,37.79) -214,35.147 -203.142,35.147 cw(c-203.142,32.607) -200.602,32.607
col12: S212.2 S226.2 S240.2 S254.2 S265.2 U301.12 | length 322.4
  Component Side w0.254: S240.2@-229.177,49.855 -229.177,55.556 cw(c-226.637,55.556) -226.637,58.096 -29.464,58.096 ccw(c-29.464,60.636) -26.924,60.636 -26.924,73.076 cw(c-24.384,73.076) -26.18,74.872 U301.12@-26.139,74.913 ccw(c-26.139,75.425) -25.959,74.946 ccw(c-26.139,75.425) -25.777,75.063 U301.12@-24.76,76.08
  Bottom Layer w0.254: S265.2@-219.64,11.755 -219.652,11.755 S254.2@-219.652,30.805 -219.652,32.037 ccw(c-222.192,32.037) -220.396,33.833 -228.434,41.871 cw(c-226.637,43.667) -229.177,43.667 S240.2@-229.177,49.855 -229.177,62.516 ccw(c-231.108,62.516) -229.743,63.881 -230.021,64.159 cw(c-228.225,65.955) -230.765,65.955 S226.2@-230.765,71.445 -230.765,85.415 cw(c-228.225,85.415) -228.225,87.955 S212.2@-214.89,87.955
col13: S213.2 U301.11 | length 255.3
  Component Side w0.254: v1(-235.458,57.785) cw(c-234.693,57.785) -234.693,58.55 -33.655,58.55 ccw(c-33.655,62.452) -33.652,58.55 ccw(c-33.655,62.452) -29.753,62.449 ccw(c-33.655,62.452) -29.753,62.452 -29.753,72.357 cw(c-27.213,72.357) -29.009,74.153 -28.872,74.29 ; -28.739,74.423 -28.872,74.29 ; U301.11@-25.113,76.434 -25.294,76.253 cw(c-26.035,76.994) -26.035,75.946 ccw(c-26.035,75.457) -26.38,75.803 U301.11@-26.704,75.479 -27.201,74.982 cw(c-27.94,75.72) -27.94,74.676 ccw(c-27.94,73.358) -28.872,74.29
  Bottom Layer w0.254: v1@-235.458,58.166 -235.458,66.158 cw(c-233.29,66.158) -234.823,67.691 -234.684,67.83 ccw(c-236.48,69.626) -233.94,69.626 -233.94,85.628 S213.2@-233.94,87.955